# EAGLE board Adafruit Proximity Trinkey (EAGLE 9.6.2)
REV: B
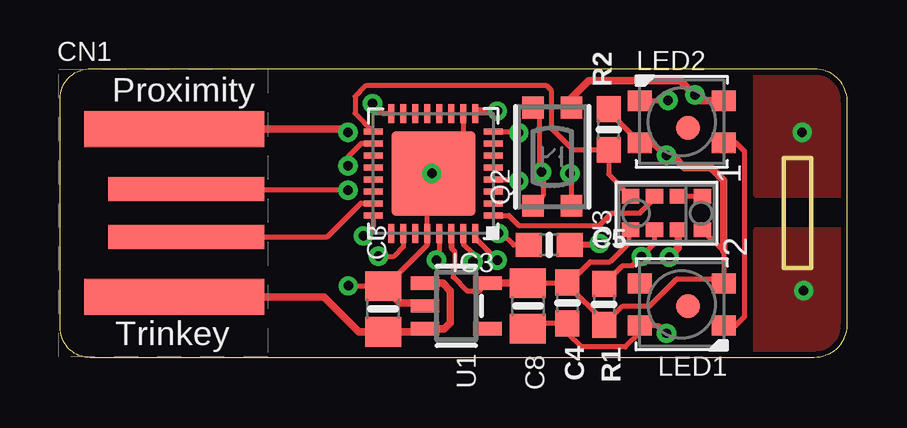
[diagram p0: board, top side]
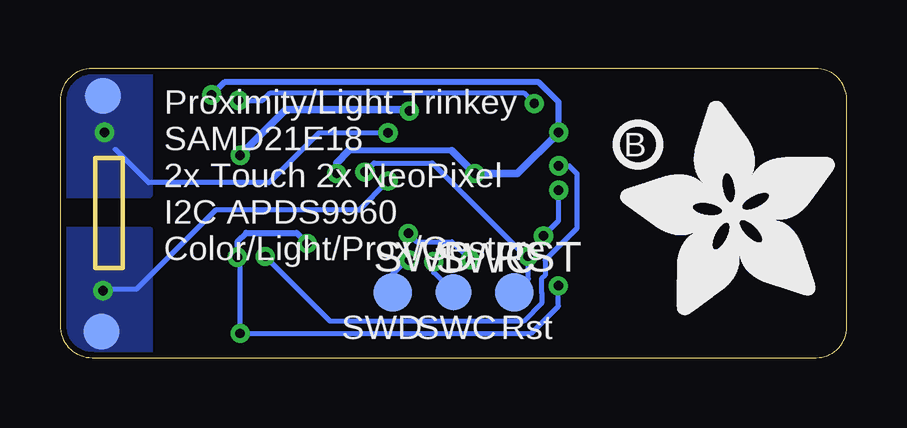
[diagram p1: board, bottom side, seen from below]

Size 32.78 x 12.06 mm. Coordinates in mm from the lower left corner, seen from the top.
Outline: 0,10.8 arc-90 1.3,12.06 31.43,12.06 arc-90 32.78,10.71 32.78,1.35 arc-90 31.43,0 1.27,0 arc-90 0,1.27 0,10.8
Copper layers (1*16): Top 0.035mm / dielectric 1.5mm / Bottom 0.035mm
Design rules "adafruit 8-8": minimum track width 6mil, minimum drill 15.5mil, track to track 8mil, track to pad 8mil, pad to pad 8mil, via to via 8mil, smd to smd 8mil, copper to edge 10mil, drill to drill 8mil, minimum pad ring 10mil, minimum via ring 8mil, stop-mask expansion 2mil, vias tented up to drill 20mil, thermal gap 10mil
Net classes: 1 highpower: width 0.406 mm, drill 0.483 mm; 2 lowpower: width 0.305 mm, drill 0.483 mm
Milling: 4 lines

## Footprints (pad centres in the part's own frame; a part is rotated, then mirrored left to right if it is on the bottom)
0805-NO = smd 1.24 x 1.5: 1 -0.95,0; 2 0.95,0
0603-NO = smd 1.075 x 1: 1 -0.85,0; 2 0.85,0
USBA_PCB = smd 7.5 x 1.5: GND -0.2,3.5; VCC -0.2,-3.5 | smd 6.5 x 1: USB_NEG 0.3,-1; USB_PLUS 0.3,1
FIDUCIAL_1MM = smd 1 x 1: 1 0,0
QFN32_5MM = smd 0.8 x 0.25: 1 -2.5,1.75; 2 -2.5,1.25; 3 -2.5,0.75; 4 -2.5,0.25; 5 -2.5,-0.25; 6 -2.5,-0.75; 7 -2.5,-1.25; 8 -2.5,-1.75; 17 2.5,-1.75; 18 2.5,-1.25; 19 2.5,-0.75; 20 2.5,-0.25; 21 2.5,0.25; 22 2.5,0.75; 23 2.5,1.25; 24 2.5,1.75 | smd 0.25 x 0.8: 9 -1.75,-2.5; 10 -1.25,-2.5; 11 -0.75,-2.5; 12 -0.25,-2.5; 13 0.25,-2.5; 14 0.75,-2.5; 15 1.25,-2.5; 16 1.75,-2.5; 25 1.75,2.5; 26 1.25,2.5; 27 0.75,2.5; 28 0.25,2.5; 29 -0.25,2.5; 30 -0.75,2.5; 31 -1.25,2.5; 32 -1.75,2.5 | smd 3.5 x 3.5: 33 0,0
LED3535 = smd 1 x 0.85: 1 -1.75,0.875; 2 -1.75,-0.875; 3 1.75,-0.875; 4 1.75,0.875
BTN_KMR2_4.6X2.8 = smd 0.9 x 0.9: A 2.05,0.8; A' -2.05,0.8; B 2.05,-0.8; B' -2.05,-0.8
TP16R = smd 1.6 x 1.6: TP 0,0
TP15R = smd 1.5 x 1.5: TP 0,0
TESTPOINT_ROUND_1.5MM_NO = smd 1.5 x 1.5: P$1 0,0
SOT23-5 = smd 0.55 x 1.2: 1 -0.95,-1.3; 2 0,-1.3; 3 0.95,-1.3; 4 0.95,1.3; 5 -0.95,1.3
APDS-9960 = smd 0.6 x 0.72: 1 0.7,1.505; 2 0.7,0.505; 3 0.7,-0.495; 4 0.7,-1.495; 5 -0.7,-1.495; 6 -0.7,-0.495; 7 -0.7,0.505; 8 -0.7,1.505

## Placement (x,y rotation side)
C3  10uF  [0805-NO]  13.46,2.03 90 top
C4  1uF  [0603-NO]  21.15,2.29 270 top
C5  1uF  [0603-NO]  20.38,4.7 0 top
C8  10uF  [0805-NO]  19.49,2.16 270 top
CN1  USB A  [USBA_PCB]  4.95,6.03 0 top
FID1  FIDUCIAL_1MM  [FIDUCIAL_1MM]  26.16,9.59 0 top
FID2  FIDUCIAL_1MM  [FIDUCIAL_1MM]  26.17,2.16 0 top
IC3  ATSAMD21E  [QFN32_5MM]  15.56,7.68 180 top
LED1  WS2812B3535  [LED3535]  25.91,2.22 180 top
LED2  WS2812B3535  [LED3535]  25.91,9.84 0 top
Q2  reset  [BTN_KMR2_4.6X2.8]  20.51,8.38 90 top
R1  4.7K  [0603-NO]  22.67,2.22 270 top
R2  4.7K  [0603-NO]  22.86,9.53 90 top
RST  TPTP16R  [TP16R]  13.84,2.73 0 bottom
SWC  TPTP15R  [TP15R]  16.38,2.73 0 bottom
SWD  TPTP16R  [TP16R]  18.92,2.73 0 bottom
TP1  [TESTPOINT_ROUND_1.5MM_NO]  31.05,1.08 0 bottom
TP2  [TESTPOINT_ROUND_1.5MM_NO]  30.99,10.92 0 bottom
U1  AP2112K-3.3  [SOT23-5]  16.51,2.16 270 top
U3  APDS-9960  [APDS-9960]  25.27,6.03 90 top
U$8  [PCBFEAT-REV-040]  8.7,8.89 180 bottom
U$10  [ADAFRUIT_9MM]  0.51,1.78 90 bottom

## Library data of the parts
C3-C5 C8 CN1 IC3 Q2 R1 R2 TP1 TP2 U1 U3 U$10 = microbuilder
FID1 FID2 = microbuilder; BOM: EXCLUDE
LED1 LED2 = adafruit
RST SWC SWD = testpad
U$8 = microbuilder; REV: B

## Nets
3.3V: C4.1 C8.1 IC3.9 IC3.30 LED1.2 LED2.2 R1.2 R2.2 U1.5 U3.5 U3.8
!RESET: IC3.26 Q2.A Q2.A' RST.TP
D+: CN1.USB_PLUS IC3.24
D-: CN1.USB_NEG IC3.23
GND: C3.2 C4.2 C5.2 C8.2 CN1.GND IC3.10 IC3.28 IC3.33 LED1.4 LED2.4 Q2.B Q2.B' U1.2 U3.6
INT: IC3.1 U3.2
N$1: LED1.1 LED2.3
N$4: U3.3 U3.4
NEOPIX: IC3.16 LED2.1
SCL: IC3.18 R1.1 U3.7
SDA: IC3.17 R2.1 U3.1
SWCLK: IC3.31 SWC.TP
SWDIO: IC3.32 SWD.TP
TOUCH1: IC3.8 TP2.P$1
TOUCH2: IC3.4 TP1.P$1
VBUS: C3.1 CN1.VCC U1.1 U1.3
VDDCORE1: C5.1 IC3.29

## Tracks (layer width: path | path; a pad name or v marks a point on that pad's centre or on a via)
3.3V  (via drill 0.39)
  Top 0.203: R2.2 22.86,10.27 LED2.2 | U3.8 23.77,5.4 23.63,5.4 23.69,5.46 23.69,4.77 22.93,4 22.1,4 21.23,3.14 C4.1 | U3.5 27.66,4.44 LED1.2 27.47,3.29 25.7,3.29 24.57,2.16 23.46,2.16 R1.2 22.67,1.51 21.14,3.03 C4.1 | C8.1 21.12,3.11 C4.1 | 16.31,4.61 16.31,4.58 16.45,4.43 16.45,3.72 16.38,3.65 16.38,3.37 16.96,2.79 17.5,2.79 U1.5
  Top 0.254: IC3.30 16.31,4.61 | v25.27,8.45 25.21,8.45 24.74,8.91
  Top 0.305: U1.5 C8.1 | LED2.2 24.21,8.91 24.74,8.91 | v25.27,8.45 25.34,8.38 25.57,8.38 26.01,7.94 27.11,7.94 27.66,7.39 27.66,4.44 | IC3.9 17.41,10.29 v18.22,10.29
  Bottom 0.305: v18.22,10.29 18.29,10.35 23.37,10.35 v25.27,8.45
!RESET  (via drill 0.39)
  Top 0.203: IC3.26 14.31,4.63 13.91,4.23 v13.27,4.23 | Q2.A' 20.13,6.75 20.13,7.68 v20.07,7.75 19.96,7.75 19.96,10.18 Q2.A
  Bottom 0.203: 13.27,3.3 v13.27,4.23 13.38,4.23 17.27,8.13 19.68,8.13 v20.07,7.75
  Bottom 0.254: RST.TP 13.27,3.3
D+  (via drill 0.39)
  Top 0.203: IC3.24 13.06,5.5 v12.64,5.08 | 11.81,6.99 6.03,6.99 5.97,7.05 5.27,7.05 CN1.USB_PLUS
  Top 0.254: v12,6.99 11.81,6.99
  Bottom 0.203: v12.64,5.08 12,5.72 v12,6.99
D-
  Top 0.203: IC3.23 12.53,6.43 11.11,5.02 5.27,5.02 CN1.USB_NEG
GND  (via drill 0.39)
  Top 0.203: IC3.10 16.81,8.93 IC3.33 | v15.49,7.68 15.31,7.5 IC3.28 15.31,4.7 13.84,3.24 | v21.25,7.68 21.31,7.62 Q2.B' | C8.2 19.72,1.44 C4.2 21.14,1.02 21.72,0.44 23.56,0.44 24.16,1.04 24.16,1.21 | 24.26,1.35 24.94,1.35 25.18,1.11 | v12.01,3 12.03,2.98 13.08,2.98
  Top 0.254: v22.48,4.76 22.41,4.7 C5.2 | v25.27,1.02 | v25.27,1.02 25.18,1.11 | 24.16,1.21 LED1.4 24.26,1.35 | 26.54,10.86 26.54,10.88 v26.46,10.96 26.44,10.96 26.29,11.11 | IC3.33 v15.49,7.68 IC3.33 | IC3.33 | C3.2 13.08,2.98 | C3.2 13.59,2.98 13.84,3.24 | C3.2 13.78,2.67
  Top 0.305: 13.78,2.67 14.16,2.29 15.08,2.29 U1.2 | U3.6 25.77,4.57 v25.39,4.19 | LED2.4 26.68,10.72 26.29,11.11 25.84,11.56 22.03,11.56 21.31,10.83 Q2.B | v12,9.4 11.87,9.53 CN1.GND
  Bottom 0.203: 25.27,1.21 25.27,4.08 v25.39,4.19 | 25.02,1.02 13.14,1.02 12.01,2.15 v12.01,3
  Bottom 0.254: 16.45,8.64 20.74,8.64 | v22.48,4.76 22.92,5.21 25.02,5.21 25.39,4.84 v25.39,4.19 | v12,9.4 12,10.67 12.83,11.49 25.93,11.49 v26.46,10.96 | 25.02,1.02 v25.27,1.02 25.27,1.21 | v26.46,10.96 | 15.11,7.68 v15.49,7.68 15.62,7.81
  Bottom 0.305: 15.62,7.81 16.45,8.64 | 20.74,8.64 21.25,8.13 v21.25,7.68 | 15.11,7.68 13.72,7.68 v12,9.4
INT
  Top 0.203: IC3.1 18.71,5.93 19.11,5.52 22.48,5.52 22.99,6.03 24.16,6.03 24.77,6.64 U3.2
N$1
  Top 0.203: LED2.3 28.17,8.97 28.51,8.62 28.51,1.69 28.17,1.35 LED1.1
N$4
  Top 0.203: U3.4 U3.3
NEOPIX  (via drill 0.39)
  Top 0.203: LED2.1 25.32,10.72 v25.34,10.73 | IC3.16 13.44,10.18 v13.02,10.6
  Bottom 0.203: v25.34,10.73 24.33,10.73 24.02,11.05 13.46,11.05 v13.02,10.6
SCL  (via drill 0.39)
  Top 0.203: R1.1 23.43,3.83 23.84,3.83 23.84,3.84 v24.22,4.22 24.77,4.77 U3.7 | IC3.18 12.55,8.93 12,8.39 v12,8
  Bottom 0.203: v12,8 11.56,8 11.24,7.68 11.24,5.4 12.57,4.07 12.57,3.44 12.72,3.29 12.72,2.71 12.7,2.69 12.7,2.29 13.46,1.52 21.53,1.52 v24.22,4.22
SDA
  Top 0.203: U3.1 22.86,7.64 R2.1 21.36,8.68 20.46,9.57 20.46,11.16 20.26,11.37 12.76,11.37 12.3,10.9 12.3,10.2 IC3.17
SWCLK  (via drill 0.39)
  Top 0.203: IC3.31 16.81,4.72 17.21,4.32 v17.21,4
  Bottom 0.203: v17.21,4 17.21,3.56 SWC.TP
SWDIO  (via drill 0.39)
  Top 0.203: v18.22,4.06 18.22,4.08 17.31,4.99 IC3.32
  Bottom 0.203: v18.22,4.06 18.35,4.06 18.92,3.49 SWD.TP
TOUCH1  (via drill 0.39)
  Top 0.203: IC3.8 19.06,9.43 v19.11,9.38
  Bottom 0.203: v19.11,9.38 21.99,9.38 24.07,7.3 29.08,7.3 30.48,8.7
  other vias: 30.92,9.4
  pour Top: 29.02,12.06 32.77,12.06 32.77,6.79 29.02,6.79
  pour Bottom (no thermals): 29.02,12.06 32.77,12.06 32.77,6.79 29.02,6.79
TOUCH2  (via drill 0.39)
  Top 0.203: IC3.4 19.05,7.43 v19.11,7.37
  Bottom 0.203: v19.11,7.37 20.32,6.16 26.29,6.16 29.59,2.86 30.99,2.86
  other vias: 30.99,2.79
  pour Top: 29.02,5.33 32.77,5.33 32.77,0 29.02,0
  pour Bottom (no thermals): 29.02,5.33 32.77,5.33 32.77,0.06 29.02,0.06
VBUS
  Top 0.254: 15.08,1.08 U1.3 15.37,1.21
  Top 0.305: 15.08,1.08 C3.1 12.44,1.08 10.99,2.53 CN1.VCC | 15.37,1.21 16,1.21 16.26,1.46 16.26,2.79 15.94,3.11 U1.1
VDDCORE1  (via drill 0.39)
  Top 0.203: IC3.29 15.81,4.2 v15.69,4.07 | C5.1 18.9,4.7 18.41,5.18 v18.27,5.18
  Bottom 0.203: v15.69,4.07 16.45,4.84 17.92,4.84 v18.27,5.18

## Text on the board
tPlace: Proximity | 1 | 2 | Trinkey
bPlace: Proximity/Light Trinkey / SAMD21E18 / 2x Touch 2x NeoPixel / I2C APDS9960 / Color/Light/Prox/Gesture | Rst | SWC | SWD
tValues: C1898